# EAGLE board order (EAGLE 9.6.2)
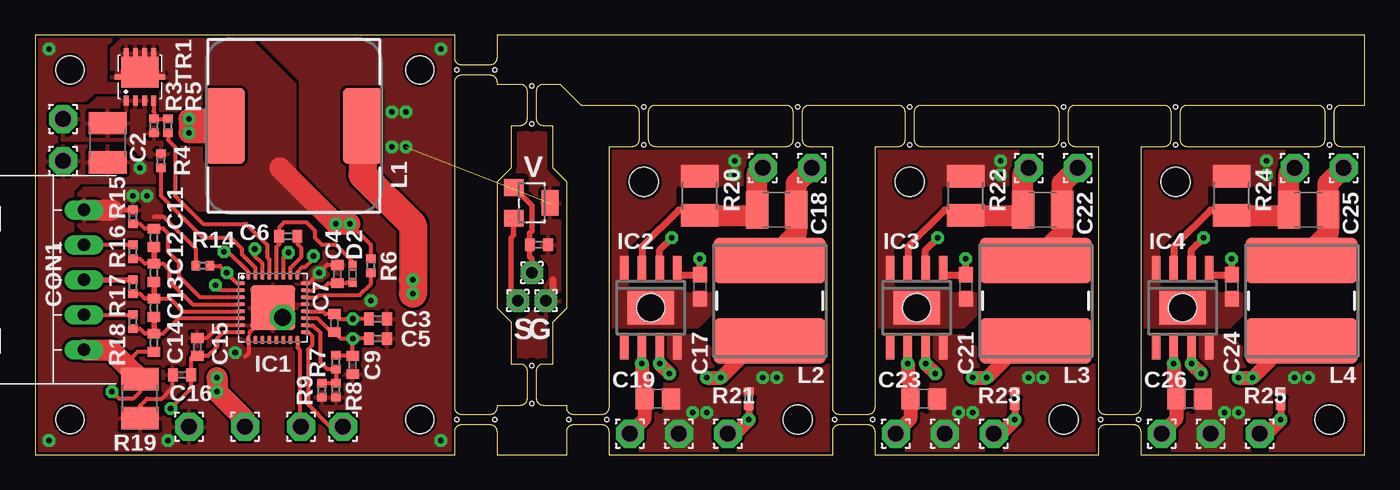
[diagram p0: board, top side]
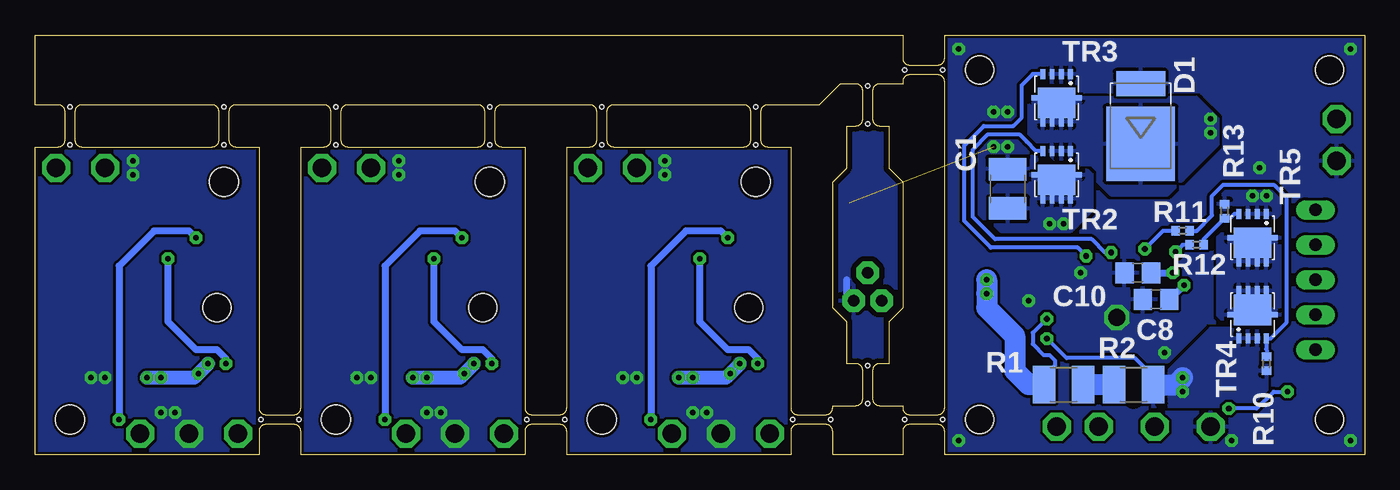
[diagram p1: board, bottom side, seen from below]

Size 95 x 30 mm. Coordinates in mm from the lower left corner, seen from the top.
Outline: 0,0 30,0 30,1.65 arc-90 30.5,2.15 32.5,2.15 arc-90 33,1.65 33,0 38,0 38,1.65 arc-90 38.5,2.15 40.5,2.15 arc-90 41,1.65 41,0 57,0 57,1.65 arc-90 57.5,2.15 59.5,2.15 arc-90 60,1.65 60,0 76,0 76,1.65 arc-90 76.5,2.15 78.5,2.15 arc-90 79,1.65 79,0 95,0 95,22 93.35,22 arc-90 92.85,22.5 92.85,24.5 arc-90 93.35,25 95,25 95,30 33,30 33,28.35 arc-90 32.5,27.85 30.5,27.85 arc-90 30,28.35 30,30 0,30 0,0
Outline: 38,3.35 38,3.5 36.35,3.5 arc-90 35.85,4 35.85,6 arc-90 36.35,6.5 37,6.5 37,9.5 38,10.5 38,19.5 37,20.5 37,23.5 36.35,23.5 arc-90 35.85,24 35.85,26 arc-90 36.35,26.5 37.5,26.5 39,25 42.65,25 arc-90 43.15,24.5 43.15,22.5 arc-90 42.65,22 41,22 41,3.35 arc-90 40.5,2.85 38.5,2.85 arc-90 38,3.35
Outline: 34.65,3.5 33,3.5 33,3.35 arc-90 32.5,2.85 30.5,2.85 arc-90 30,3.35 30,26.65 arc-90 30.5,27.15 32.5,27.15 arc-90 33,26.65 33,26.5 34.65,26.5 arc-90 35.15,26 35.15,24 arc-90 34.65,23.5 34,23.5 34,20.5 33,19.5 33,10.5 34,9.5 34,6.5 34.65,6.5 arc-90 35.15,6 35.15,4 arc-90 34.65,3.5
Outline: 44.35,25 53.65,25 arc-90 54.15,24.5 54.15,22.5 arc-90 53.65,22 44.35,22 arc-90 43.85,22.5 43.85,24.5 arc-90 44.35,25
Outline: 55.35,25 61.65,25 arc-90 62.15,24.5 62.15,22.5 arc-90 61.65,22 60,22 60,3.35 arc-90 59.5,2.85 57.5,2.85 arc-90 57,3.35 57,22 55.35,22 arc-90 54.85,22.5 54.85,24.5 arc-90 55.35,25
Outline: 63.35,25 72.65,25 arc-90 73.15,24.5 73.15,22.5 arc-90 72.65,22 63.35,22 arc-90 62.85,22.5 62.85,24.5 arc-90 63.35,25
Outline: 74.35,25 80.65,25 arc-90 81.15,24.5 81.15,22.5 arc-90 80.65,22 79,22 79,3.35 arc-90 78.5,2.85 76.5,2.85 arc-90 76,3.35 76,22 74.35,22 arc-90 73.85,22.5 73.85,24.5 arc-90 74.35,25
Outline: 82.35,25 91.65,25 arc-90 92.15,24.5 92.15,22.5 arc-90 91.65,22 82.35,22 arc-90 81.85,22.5 81.85,24.5 arc-90 82.35,25
Copper layers (1*16): Top 0.035mm / dielectric 1.5mm / Bottom 0.035mm
Design rules "SeeedStudio_2layer_DRU_no_angle_20140221_IMD555": minimum track width 0.2mm, minimum drill 0.3mm, track to track 0.2mm, track to pad 0.2mm, pad to pad 0.2mm, via to via 0.2mm, smd to smd 0mil, copper to edge 0.2mm, drill to drill 10mil, minimum pad ring 0.25mm, minimum via ring 0.2mm, stop-mask expansion 0.03mm, vias tented up to drill 5mm, thermal gap 10mil
Holes 2 mm at 2.5,2.5 27.5,2.5 2.5,27.5 27.5,27.5 44,10.5 63,10.5 82,10.5
Holes 2.1 mm at 54.5,2.5 43.5,19.5 73.5,2.5 62.5,19.5 92.5,2.5 81.5,19.5
Holes 0.3 mm at 32.85,27.5 30.15,27.5 32.85,2.5 30.15,2.5 43.5,22.15 43.5,24.85 54.5,22.15 54.5,24.85 40.85,2.5 38.15,2.5 57.15,2.5 62.5,22.15 62.5,24.85 73.5,22.15 73.5,24.85 59.85,2.5 76.15,2.5 81.5,22.15 81.5,24.85 92.5,22.15 92.5,24.85 78.85,2.5 35.5,23.65 35.5,26.35 35.5,3.65 35.5,6.35
tRestrict: area 29.8,0 to 32.7,30; area 38.3,0 to 41.2,30; area 56.8,0 to 60.2,30; area 75.8,0 to 79.2,30; area 38.5,21.8 to 95,25.2; 43 lines
bRestrict: area 29.8,0 to 32.7,30; area 38.3,0 to 41.2,30; area 56.8,0 to 60.2,30; area 75.8,0 to 79.2,30; area 38.5,21.8 to 95,25.2; 1 lines

## Footprints (pad centres in the part's own frame; a part is rotated, then mirrored left to right if it is on the bottom)
C1210 = smd 1.6 x 2.7: 1 -1.4,0; 2 1.4,0
C0402 = smd 0.7 x 0.9: 1 -0.65,0; 2 0.65,0
C0805 = smd 1.3 x 1.5: 1 -0.95,0; 2 0.95,0
C0603 = smd 1.1 x 1: 1 -0.85,0; 2 0.85,0
XH-5_S = drill 0.9 long: 1 5,0; 2 2.5,0; 3 0,0; 4 -2.5,0; 5 -5,0
TO-277A = smd 1.78 x 3.5: A 3.01,0 | smd 5.3 x 4.9: C -1.29,0
VMN2 = smd 0.65 x 0.55: A 0.6,0; C -0.6,0
QFN32 = smd 0.6 x 0.3: 1 -2.3,1.75; 2 -2.3,1.25; 3 -2.3,0.75; 4 -2.3,0.25; 5 -2.3,-0.25; 6 -2.3,-0.75; 7 -2.3,-1.25; 8 -2.3,-1.75; 17 2.3,-1.75; 18 2.3,-1.25; 19 2.3,-0.75; 20 2.3,-0.25; 21 2.3,0.25; 22 2.3,0.75; 23 2.3,1.25; 24 2.3,1.75 | smd 0.3 x 0.6: 9 -1.75,-2.3; 10 -1.25,-2.3; 11 -0.75,-2.3; 12 -0.25,-2.3; 13 0.25,-2.3; 14 0.75,-2.3; 15 1.25,-2.3; 16 1.75,-2.3; 25 1.75,2.3; 26 1.25,2.3; 27 0.75,2.3; 28 0.25,2.3; 29 -0.25,2.3; 30 -0.75,2.3; 31 -1.25,2.3; 32 -1.75,2.3 | smd 3.2 x 3.2: EXP 0,0
HSOP8 = smd 0.6 x 1.8: 1 -1.905,-2.8; 2 -0.635,-2.8; 3 0.635,-2.8; 4 1.905,-2.8; 5 1.905,2.8; 6 0.635,2.8; 7 -0.635,2.8; 8 -1.905,2.8 | smd 3.3 x 2.4: EP 0,0
SOT23-W = smd 1.2 x 1.4: 1 -1.1,-1.3; 2 1.1,-1.3 | smd 1.8 x 1.2: 3 0,1.3
SCRH125 = smd 5.4 x 2.8: 1 0,4.9; 2 0,-4.9
L8080 = smd 8 x 3.25: 1 0,2.875; 2 0,-2.875
2.0/1.3 = drill 1.3 pad 2 octagon: 1 0,0
1,6/0,8 = drill 0.813 pad 1.6 octagon: 1 0,0
R1210 = smd 1.6 x 2.7: 1 -1.4,0; 2 1.4,0
R0402 = smd 0.6 x 0.7: 1 -0.5,0; 2 0.5,0
TSON_ADVANCE = smd 0.35 x 0.7: 1 -0.975,-1.7; 2 -0.325,-1.7; 3 0.325,-1.7; 4 0.975,-1.7; 5 0.975,1.7; 6 0.325,1.7; 7 -0.325,1.7; 8 -0.975,1.7 | smd 2.65 x 2.2: DRAIN1 0,0.35 | smd 3.6 x 0.4: DRAIN2 0,0

## Placement (x,y rotation side)
C1  22u  [C1210]  25.5,19 90 bottom
C2  22u  [C1210]  5.2,22.3 270 top
C3  [C0402]  24.5,9.7 0 top
C4  [C0402]  21.6,12.9 90 top
C5  [C0402]  24.5,8.3 0 top
C6  [C0402]  18.1,15.6 180 top
C7  [C0402]  21.4,9.4 270 top
C8  [C0805]  14.9,11.1 180 bottom
C9  [C0402]  22.7,6.4 270 top
C10  [C0805]  16.2,13 180 bottom
C11  0.1u  [C0402]  8.5,15.5 270 top
C12  0.1u  [C0402]  8.5,13 270 top
C13  0.1u  [C0402]  8.5,10.5 270 top
C14  0.1u  [C0402]  8.5,8 270 top
C15  100p  [C0402]  11.6,7.7 90 top
C16  0.1u  [C0402]  10.5,5.7 180 top
C17  1u  [C0603]  47.5,12 270 top
C18  1.2A:22u  [C1210]  53,17.5 180 top
C19  10u  [C0805]  44.5,4 0 top
C20  [C0402]  36,15 0 top
C21  1u  [C0603]  66.5,12 270 top
C22  1.2A:22u  [C1210]  72,17.5 180 top
C23  10u  [C0805]  63.5,4 0 top
C24  1u  [C0603]  85.5,12 270 top
C25  1.2A:22u  [C1210]  91,17.5 180 top
C26  10u  [C0805]  82.5,4 0 top
CON1  5P_(ICSP)XH_S  [XH-5_S]  3.5,12.5 90 top
D1  [TO-277A]  16,23.5 90 bottom
D2  [VMN2]  22.7,12.9 270 top
IC1  BQ40Z60  [QFN32]  17,10.5 0 top
IC2  LED2001  [HSOP8]  44,10.5 180 top
IC3  LED2001  [HSOP8]  63,10.5 180 top
IC4  LED2001  [HSOP8]  82,10.5 180 top
IC7  SI7201-B-00-FV  [SOT23-W]  35.5,18 270 top
L1  22u  [SCRH125]  18.5,23.5 90 top
L2  1.2A:10u  [L8080]  52.5,11 180 top
L3  1.2A:10u  [L8080]  71.5,11 180 top
L4  1.2A:10u  [L8080]  90.5,11 180 top
PAD1  WIREPAD2.0/1.2  [2.0/1.3]  2,24 0 top
PAD2  WIREPAD2.0/1.2  [2.0/1.3]  2,21 0 top
PAD3  WIREPAD2.0/1.2  [2.0/1.3]  19,2 0 top
PAD4  WIREPAD2.0/1.2  [2.0/1.3]  22,2 0 top
PAD5  WIREPAD2.0/1.2  [2.0/1.3]  15,2 0 top
PAD6  WIREPAD2.0/1.2  [2.0/1.3]  11,2 0 top
PAD7  WIREPAD2.0/1.2  [2.0/1.3]  42.5,1.5 90 top
PAD8  WIREPAD2.0/1.2  [2.0/1.3]  49.5,1.5 90 top
PAD9  WIREPAD2.0/1.2  [2.0/1.3]  46,1.5 90 top
PAD10  WIREPAD2.0/1.2  [2.0/1.3]  55.5,20.5 90 top
PAD11  WIREPAD2.0/1.2  [2.0/1.3]  52,20.5 90 top
PAD12  WIREPAD2.0/1.2  [2.0/1.3]  61.5,1.5 90 top
PAD13  WIREPAD2.0/1.2  [2.0/1.3]  68.5,1.5 90 top
PAD14  WIREPAD2.0/1.2  [2.0/1.3]  65,1.5 90 top
PAD15  WIREPAD2.0/1.2  [2.0/1.3]  74.5,20.5 90 top
PAD16  WIREPAD2.0/1.2  [2.0/1.3]  71,20.5 90 top
PAD17  WIREPAD2.0/1.2  [2.0/1.3]  80.5,1.5 90 top
PAD18  WIREPAD2.0/1.2  [2.0/1.3]  87.5,1.5 90 top
PAD19  WIREPAD1,6/0,8  [1,6/0,8]  34.5,11 0 top
PAD20  WIREPAD1,6/0,8  [1,6/0,8]  35.5,13 0 top
PAD21  WIREPAD1,6/0,8  [1,6/0,8]  36.5,11 0 top
PAD22  WIREPAD2.0/1.2  [2.0/1.3]  84,1.5 90 top
PAD23  WIREPAD2.0/1.2  [2.0/1.3]  93.5,20.5 90 top
PAD24  WIREPAD2.0/1.2  [2.0/1.3]  90,20.5 90 top
R1  5m  [R1210]  21.5,5 0 bottom
R2  5m  [R1210]  16.5,5 0 bottom
R3  [R0402]  8.5,23.5 270 top
R4  [R0402]  9,21 90 top
R5  [R0402]  9.5,23.5 90 top
R6  [R0402]  24,13.5 90 top
R7  [R0402]  21.5,6.6 90 top
R8  [R0402]  21.5,4.6 90 top
R9  [R0402]  20.5,4.6 90 top
R10  10M  [R0402]  7,6.5 270 bottom
R11  5.1k  [R0402]  13,16 0 bottom
R12  5.1k  [R0402]  12,15 0 bottom
R13  10M  [R0402]  10,17.4 90 bottom
R14  10  [R0402]  12,13.5 180 top
R15  100  [R0402]  7,17 90 top
R16  100  [R0402]  7,14.5 90 top
R17  100  [R0402]  7,12 90 top
R18  100  [R0402]  7,9.5 90 top
R19  5m  [R1210]  7.5,4 90 top
R20  1.2A:82m  [R1210]  47.5,18.5 90 top
R21  10k  [R0402]  51,4 270 top
R22  1.2A:82m  [R1210]  66.5,18.5 90 top
R23  10k  [R0402]  70,4 270 top
R24  1.2A:82m  [R1210]  85.5,18.5 90 top
R25  10k  [R0402]  89,4 270 top
TR1  MOSFET_NTSON  [TSON_ADVANCE]  7.5,27 0 top
TR2  MOSFET_NTSON  [TSON_ADVANCE]  22,20 180 bottom
TR3  MOSFET_NTSON  [TSON_ADVANCE]  22,25.5 180 bottom
TR4  MOSFET_NTSON  [TSON_ADVANCE]  8,10 0 bottom
TR5  MOSFET_NTSON  [TSON_ADVANCE]  8,15.5 180 bottom

## Library data of the parts
C1-C26 = rcl; SPICEPREFIX: C
CON1 = 4 CONNECTOR
D1 IC1-IC4 TR1-TR5 = 0 my parts
D2 = 5 D
IC7 = allegro; OC_FARNELL: unknown; OC_NEWARK: unknown
L1-L4 = 2 RCL
PAD1-PAD24 = 4 PAD
R1-R25 = rcl; SPICEPREFIX: R

## Nets
GND: C1.2 C2.2 C3.2 C4.2 C5.2 C8.2 C9.2 C10.2 C15.2 C16.2 C20.2 D1.A IC1.7 IC1.9 IC1.21 IC1.24 IC1.EXP IC7.3 PAD2.1 PAD6.1 PAD21.1 R8.1 R9.1 R19.1 TR3.1 TR3.2 TR3.3
GND1: C17.2 C19.2 IC2.4 IC2.8 IC2.EP PAD9.1 R20.2 R21.1
GND2: C21.2 C23.2 IC3.4 IC3.8 IC3.EP PAD14.1 R22.2 R23.1
GND3: C24.2 C26.2 IC4.4 IC4.8 IC4.EP PAD22.1 R24.2 R25.1
N$1: CON1.4 R18.2
N$2: R1.2 R2.1
N$3: C18.2 IC2.3 PAD11.1 R20.1
N$4: CON1.3 R17.2
N$5: IC2.7 L2.1
N$6: C18.1 L2.2 PAD10.1
N$7: CON1.2 R16.2
N$8: IC7.2 PAD19.1
N$9: IC3.2 PAD13.1 R23.2
N$10: CON1.1 R13.2 R14.2 R15.2 TR5.1 TR5.2 TR5.3
N$11: TR4.5 TR4.6 TR4.7 TR4.8 TR4.DRAIN1 TR4.DRAIN2 TR5.5 TR5.6 TR5.7 TR5.8 TR5.DRAIN1 TR5.DRAIN2
N$12: C22.1 L3.2 PAD15.1
N$13: C14.2 C15.1 C16.1 CON1.5 IC1.8 R19.2
N$14: C22.2 IC3.3 PAD16.1 R22.1
N$15: IC2.2 PAD8.1 R21.2
N$16: IC3.7 L3.1
N$17: C10.1 IC1.1 R14.1
N$18: IC1.30 R11.1
N$19: IC4.2 PAD18.1 R25.2
N$20: IC1.32 R12.1
N$21: R12.2 R13.1 TR5.4
N$22: C25.1 L4.2 PAD23.1
N$23: R10.1 R11.2 TR4.4
N$24: C25.2 IC4.3 PAD24.1 R24.1
N$25: IC4.7 L4.1
N$28: C8.1 IC1.2
N$29: C11.2 C12.1 IC1.4 R16.1
N$30: IC1.18 R7.1 R8.2 R9.2
N$43: C12.2 C13.1 IC1.5 R17.1
N$44: IC1.29 R5.1
N$45: R3.1 R5.2 TR1.4
N$46: C6.1 IC1.26
N$47: C6.2 D2.C IC1.28
N$48: C4.1 D2.A IC1.23
N$49: D1.C L1.1 TR2.1 TR2.2 TR2.3 TR3.5 TR3.6 TR3.7 TR3.8 TR3.DRAIN1 TR3.DRAIN2
N$50: C1.1 R6.2 TR1.5 TR1.6 TR1.7 TR1.8 TR1.DRAIN1 TR1.DRAIN2 TR2.5 TR2.6 TR2.7 TR2.8 TR2.DRAIN1 TR2.DRAIN2
N$51: IC1.27 TR2.4
N$52: IC1.25 TR3.4
N$63: C3.1 C7.1 IC1.20 L1.2 R1.1
N$65: IC1.31 R4.1
N$66: C2.1 PAD1.1 R3.2 R4.2 TR1.1 TR1.2 TR1.3
N$67: IC1.22 R6.1
N$68: C13.2 C14.1 IC1.6 R18.1
N$69: C11.1 IC1.3 R15.1
N$70: IC1.17 PAD4.1
N$71: IC1.16 PAD3.1
V+: C5.1 C7.2 C9.1 IC1.19 PAD5.1 R2.2 R7.2 R10.2 TR4.1 TR4.2 TR4.3
V+1: C17.1 C19.1 IC2.1 IC2.6 PAD7.1
V+2: C21.1 C23.1 IC3.1 IC3.6 PAD12.1
V+3: C24.1 C26.1 IC4.1 IC4.6 PAD17.1
VDD1: C20.1 IC7.1 PAD20.1

## Tracks (layer width: path | path; a pad name or v marks a point on that pad's centre or on a via)
GND  (via drill 0.4 pad 0.9, 1.2)  (1 unrouted)
  Top 0.2: IC1.EXP 17,10.3 | 15.4,8.8 15.3,8.7 15.3,8.5 15.25,8.45 IC1.9
  Top 0.3: IC1.7 13.15,9.25 12.25,8.35 C15.2 | IC1.24 19.55,12.25 v20.3,13 20.85,13.55 C4.2 | R19.1 7.5,3.5 8,4 9.05,4 9.85,4.8 C16.2 | IC1.9 15.25,7.25 15,7 | 17,10.3 16.9,10.3 15.4,8.8
  Top 0.5: PAD21.1 37,11.5 37,12.5
  Bottom 0.5: PAD21.1 37,11.5 37,12.5
  other vias: 24,11 14.3,7.3 17.7,9.8 26.5,22 25.5,22 25.5,24.5 26.5,24.5 7.5,20.5 1,1 9.5,1 1,29 29,1 29,29
  pour Top (rank 6): 0,30 30,30 30,0 0,0
  pour Bottom (rank 6): 0,30 30,30 30,0 0,0
  pour Top (isolate 0.4, rank 6): 33,23.5 38,23.5 38,6.5 33,6.5
  pour Bottom (isolate 0.4, rank 6): 33,23.5 38,23.5 38,6.5 33,6.5
GND1  (via drill 0.4 pad 0.9)
  other vias: 50,20 50,21 47,3 48,3 53,5.5 52,5.5
  pour Top (rank 6, no thermals): 41,0 41,22 57,22 57,0
  pour Bottom (rank 6, no thermals): 41,0 41,22 57,22 57,0
GND2  (via drill 0.4 pad 0.9)
  other vias: 69,20 69,21 66,3 67,3 72,5.5 71,5.5
  pour Top (rank 6, no thermals): 60,0 60,22 76,22 76,0
  pour Bottom (rank 6, no thermals): 60,0 60,22 76,22 76,0
GND3  (via drill 0.4 pad 0.9)
  other vias: 88,20 88,21 85,3 86,3 91,5.5 90,5.5
  pour Top (rank 6, no thermals): 79,0 79,22 95,22 95,0
  pour Bottom (rank 6, no thermals): 79,0 79,22 95,22 95,0
N$1
  Top 0.3: CON1.4 R18.2
N$2
  Bottom 1.5: R2.1 R1.2
N$3
  Top 0.5: IC2.3 43.37,14.87 46,17.5 47.1,17.5 R20.1
  Top 1: R20.1 47.6,17
  Top 1.5: R20.1 51.2,17.1 C18.2 51.6,20.1 PAD11.1
N$4
  Top 0.4: CON1.3 R17.2
N$5  (via drill 0.4 pad 0.9)
  Top 0.5: IC2.7 v44.63,6.5
  Top 1: v44.63,6.5 v45.34,5.8 | v48,5.5 v49,5.5 51.62,8.12 L2.1
  Bottom 1: v44.63,6.5 45.63,5.5 v48,5.5 v49,5.5
N$6
  Top 1.5: PAD10.1 54.4,19.4 C18.1 54.4,15.78 L2.2
N$7
  Top 0.3: R16.2 CON1.2
N$8
  Top 0.4: IC7.2 34.2,15.7 34,15.5 34,11.5 PAD19.1
N$9  (via drill 0.4 pad 0.9)
  Top 0.5: IC3.2 63.63,14.63 v64.5,15.5 | R23.2 v70,2.5
  Top 1: v70,2.5 69,1.5 PAD13.1
  Bottom 0.5: v64.5,15.5 65,16 67.5,16 70,13.5 v70,2.5
N$10  (via drill 0.4 pad 0.9)
  Top 0.3: R14.2 11.5,14.7 9.2,17 8.5,17
  Top 0.4: 5,17.5 5.5,17.5 R15.2
  Top 1.5: CON1.1 5.5,17.5
  other vias: 8,18.5 7,18.5
  pour Bottom: 6.7,19.2 9.9,19.2 10.6,18.5 10.6,17.6 10,17 6.3,17 5.9,17.4 5.9,18.4
  pour Top: 3.5,19 3,18.5 3,16.5 4,15.5 7.5,15.5 9,17 9,18.5 8.5,19
N$11
  pour Bottom: 6.5,16 10,16 10.5,15.5 10.5,10 10,9.5 6,9.5 5.5,10 5.5,15
N$12
  Top 1.5: PAD15.1 73.4,19.4 C22.1 73.4,15.78 L3.2
N$13  (via drill 0.4 pad 0.9)
  Top 0.3: IC1.8 13.45,8.75 13,8.3 13,7.7 12.35,7.05 C15.1 11.45,7.2 11.15,6.9 C16.1 11.15,4.75 v9.7,3.3 | R19.2 7.5,4.5 7,4 6,4 v5.5,4.5 | C14.2 7.35,7.35 6.45,6.45
  Top 1.5: R19.2 6.45,6.45 5.4,7.5 CON1.5
  Bottom 0.3: v5.5,4.5 6.5,4.5 7.7,3.3 v9.7,3.3
N$14
  Top 0.5: IC3.3 62.37,14.87 65,17.5 66.1,17.5 R22.1
  Top 1: R22.1 66.6,17
  Top 1.5: R22.1 70.2,17.1 C22.2 70.6,20.1 PAD16.1
N$15  (via drill 0.4 pad 0.9)
  Top 0.5: IC2.2 44.63,14.63 v45.5,15.5 | R21.2 v51,2.5
  Top 1: v51,2.5 50,1.5 PAD8.1
  Bottom 0.5: v45.5,15.5 46,16 48.5,16 51,13.5 v51,2.5
N$16  (via drill 0.4 pad 0.9)
  Top 0.5: IC3.7 v63.63,6.5
  Top 1: v63.63,6.5 v64.33,5.8 | v67,5.5 v68,5.5 70.62,8.12 L3.1
  Bottom 1: v63.63,6.5 64.64,5.5 v67,5.5 v68,5.5
N$17  (via drill 0.4 pad 0.9)
  Top 0.3: IC1.1 14.45,12.25 v13.7,13 13.2,13.5 R14.1
  Bottom 0.5: C10.1 v13.7,13
N$18  (via drill 0.4 pad 0.9)
  Top 0.3: IC1.30 16.25,13.65 15.7,14.2 v15.7,14.7
  Bottom 0.3: R11.1 14.4,16 v15.7,14.7
N$19  (via drill 0.4 pad 0.9)
  Top 0.5: IC4.2 82.64,14.63 v83.5,15.5 | R25.2 v89,2.5
  Top 1: v89,2.5 88,1.5 PAD18.1
  Bottom 0.5: v83.5,15.5 84,16 86.5,16 89,13.5 v89,2.5
N$20  (via drill 0.4 pad 0.9)
  Top 0.3: IC1.32 15.25,13.05 13.8,14.5 v13.5,14.5
  Bottom 0.3: R12.1 13,15 v13.5,14.5
N$21
  Bottom 0.3: R12.2 11.5,15.4 R13.1 9.6,16.9 9.3,17.2 TR5.4
N$22
  Top 1.5: PAD23.1 92.4,19.4 C25.1 92.4,15.78 L4.2
N$23
  Bottom 0.3: R11.2 12,16 10.9,17.1 10.9,18.5 10.1,19.3 6.5,19.3 5.6,18.4 5.6,9.4 6.7,8.3 TR4.4 7.03,7.53 7,7.5 R10.1
N$24
  Top 0.5: IC4.3 81.36,14.87 84,17.5 85.1,17.5 R24.1
  Top 1: R24.1 85.6,17
  Top 1.5: R24.1 89.2,17.1 C25.2 89.6,20.1 PAD24.1
N$25  (via drill 0.4 pad 0.9)
  Top 0.5: IC4.7 v82.64,6.5
  Top 1: v82.64,6.5 v83.33,5.8 | v86,5.5 v87,5.5 89.62,8.12 L4.1
  Bottom 1: v82.64,6.5 83.64,5.5 v86,5.5 v87,5.5
N$28  (via drill 0.4 pad 0.9)
  Top 0.3: IC1.2 13.25,11.75 v12.9,12.1
  Bottom 0.5: C8.1 13.9,11.1 v12.9,12.1
N$29
  Top 0.3: R16.1 7.5,14 7.85,13.65 C12.1 9.15,13.65 9.6,13.2 9.6,12.4 11.25,10.75 IC1.4
  Top 0.4: C11.2 C12.1
N$30
  Top 0.3: IC1.18 19.85,9.25 20.4,8.7 20.4,6.6 20.9,6.1 R7.1 R8.2 R9.2
N$43
  Top 0.3: R17.1 7.5,11.5 7.85,11.15 C13.1 9.65,11.15 10.55,10.25 IC1.5
  Top 0.4: C13.1 C12.2
N$44
  Top 0.3: IC1.29 16.75,13.95 16.6,14.1 16.6,15 15.1,16.5 12,16.5 10,18.5 10,22 9.5,22.5 R5.1
N$45
  Top 0.3: R5.2 R3.1 8.5,24.5 8.47,24.52 TR1.4
N$46
  Top 0.3: IC1.26 18.25,13.35 19,14.1 19,14.81 18.75,15.06 C6.1
N$47
  Top 0.3: IC1.28 17.25,14.85 17.45,15.05 C6.2 17.45,16.25 17.8,16.6 19.4,16.6 20,16 20,15.5 20.5,15 21.5,15 22.7,13.8 D2.C
N$48
  Top 0.3: IC1.23 19.85,11.75 20.1,12 20.7,12 20.95,12.25 C4.1 22.25,12.25 22.3,12.3 D2.A
N$49  (via drill 0.4 pad 0.9)
  Top 1.5: L1.1 13.1,24 v11,24 v11,23 13.1,23
  pour Bottom (rank 2): 12,25.5 23.5,25.5 24,25 24,23 22,21 20.5,21 18.1,18.6 14.1,18.6 10.5,22.2 10.5,24
N$50  (via drill 0.4 pad 0.9)
  Top 0.3: R6.2 24,15 v22.5,16.5
  Top 1.5: 17.5,20.5 v21.5,16.5 v22.5,16.5
  pour Bottom: 19.5,20 20,20.5 25,20.5 26.5,19 26.5,16.5 26,16 21,16 19.5,17.5
  pour Top (rank 5): 6.5,30 15,30 18.5,26.5 18.5,20 21,17.5 11.5,17.5 10.5,18.5 10.5,23 8.5,25 7,25 5.5,26.5 5.5,29
N$51  (via drill 0.4 pad 0.9)
  Top 0.3: IC1.27 17.75,14.1 v18.1,14.45
  Bottom 0.3: v18.1,14.45 18.55,14.45 19.5,15.4 26.4,15.4 28,17 28,21.8 26.9,22.9 24.68,22.9 24.14,22.36 23.48,21.7 TR2.4
N$52  (via drill 0.4 pad 0.9)
  Top 0.3: IC1.25 18.75,13.05 19.1,13.4 19.3,13.4 19.9,14 v19.9,14.2
  Bottom 0.3: v19.9,14.2 20.5,14.8 26.7,14.8 28.6,16.7 28.6,22.1 27.2,23.5 25.1,23.5 24.5,24.1 24.5,26.4 23.7,27.2 TR3.4
N$63  (via drill 0.4 pad 0.9)
  Top 0.3: IC1.20 20.55,10.25 20.75,10.05 C7.1 21.75,9.7 v22.7,9.7 C3.1
  Top 2: L1.2 23.4,20 27,16.4 v27,12.5 v27,11.5
  Bottom 0.3: v22.7,9.7 23.7,8.7 23.7,7.9 22.9,7.1 22.5,7.1 22.1,6.7 22.1,6.4 22.9,5.6 R1.1
  Bottom 1.5: R1.1 24,5 25,6 25,8.5 27,10.5 v27,11.5 v27,12.5
N$65
  Top 0.3: IC1.31 15.75,13.35 14.8,14.3 14.8,14.7 14,15.5 12,15.5 9,18.5 R4.1
N$66
  pour Top (rank 2): 1.9,24.9 3.9,24.9 4.5,25.5 8.5,25.5 9.5,24.5 9.5,21.5 9,21 8.5,21 8,21.5 7.5,21.5 6.5,22.5 2,22.5 1.5,23 1.5,24.5
N$67
  Top 0.3: IC1.22 20.15,11.25 20.3,11.4 23.2,11.4 24,12.2 R6.1
N$68
  Top 0.3: R18.1 7.5,9 7.85,8.65 C14.1 9.15,8.65 10.25,9.75 IC1.6
  Top 0.4: C14.1 C13.2
N$69
  Top 0.3: R15.1 7.5,16.5 7.85,16.15 C11.1 9.15,16.15 9.5,15.8 9.5,14.5 10.3,13.7 10.3,12.75 11.8,11.25 IC1.3
N$70
  Top 0.3: IC1.17 19.55,8.75 19.8,8.5 19.8,7.8 19.5,7.5 19.5,3.6 21.1,2 PAD4.1
N$71
  Top 0.3: IC1.16 18.75,7.65 18.9,7.5 18.9,2.1 PAD3.1
V+  (via drill 0.4 pad 0.9)
  Top 0.3: IC1.19 20.19,9.75 21.19,8.75 C7.2 21.85,8.3 v22.7,8.3 | R7.2 21.7,7.1 21.75,7.05 C9.1 v22.7,8.3 | C5.1 v22.7,8.3
  Top 1.5: PAD5.1 15,2.5 v13,4.5 v13,5.5
  Bottom 0.3: v22.7,8.3 21.3,6.9 16.4,6.9 15.1,5.6 R2.2
  Bottom 1.5: R2.2 13.5,5 v13,5.5
  pour Bottom: 7.5,9 11,9 14.5,5.5 15.5,5.5 16,5 16,4 15.5,3.5 8,3.5 7,4.5 7,8.5
V+1  (via drill 0.4 pad 0.9)
  Top 0.5: IC2.6 v43.37,6.5 | v47.5,14 C17.1 46.15,12.85 45.91,13.1 IC2.1
  Top 1: v43.37,6.5 43.37,5.37 43.55,5.18 C19.1 43.55,2.55 PAD7.1
  Bottom 0.5: v47.5,14 47.5,9.5 45.5,7.5 44,7.5 43.37,6.87 v43.37,6.5
V+2  (via drill 0.4 pad 0.9)
  Top 0.5: IC3.6 v62.37,6.5 | v66.5,14 C21.1 65.15,12.85 64.91,13.1 IC3.1
  Top 1: v62.37,6.5 62.37,5.37 62.55,5.18 C23.1 62.55,2.55 PAD12.1
  Bottom 0.5: v66.5,14 66.5,9.5 64.5,7.5 63,7.5 62.37,6.87 v62.37,6.5
V+3  (via drill 0.4 pad 0.9)
  Top 0.5: IC4.6 v81.36,6.5 | v85.5,14 C24.1 84.15,12.85 83.91,13.1 IC4.1
  Top 1: v81.36,6.5 81.36,5.37 81.55,5.18 C26.1 81.55,2.55 PAD17.1
  Bottom 0.5: v85.5,14 85.5,9.5 83.5,7.5 82,7.5 81.36,6.87 v81.36,6.5
VDD1
  Top 0.4: IC7.1 35.5,17.8 35.5,16 35.35,15.85 C20.1 35.35,14.15 35.5,14 PAD20.1

## Text on the board
tPlace: V | S | G